# EAGLE board PCB final (EAGLE 9.7.0)
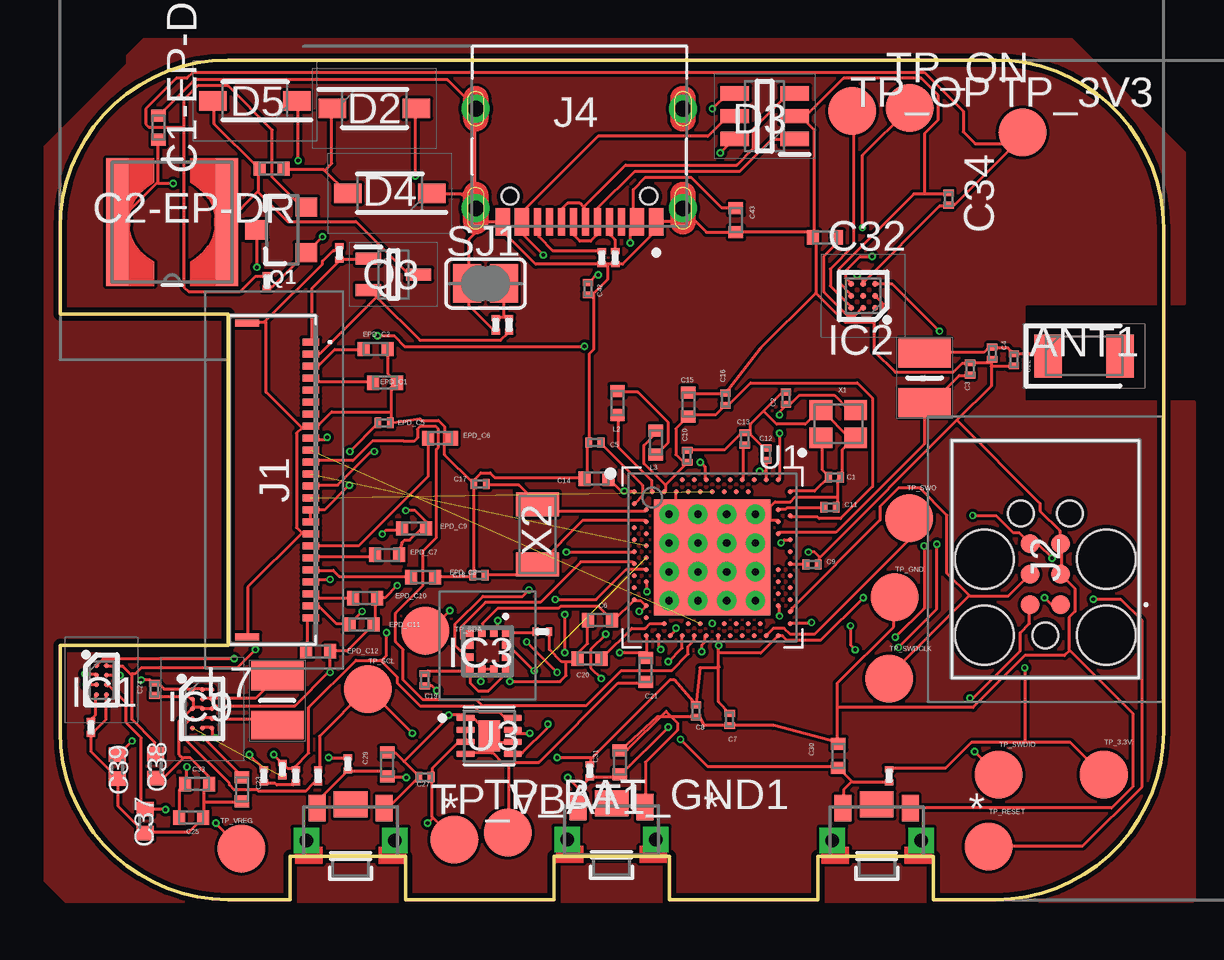
[diagram p0: board, top side]
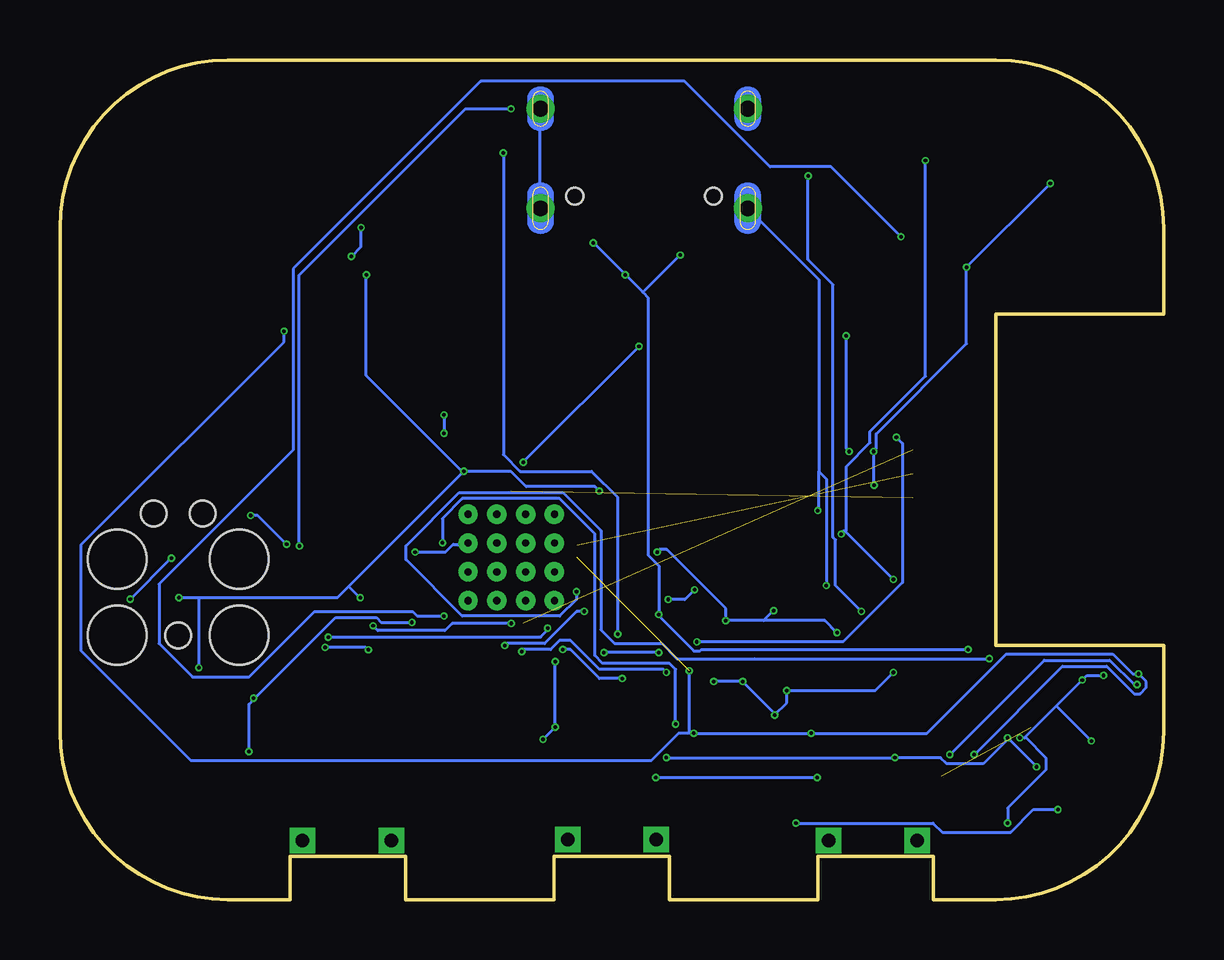
[diagram p1: board, bottom side, seen from below]

Size 46 x 35 mm. Coordinates in mm from the lower left corner, seen from the top.
Outline: 39,0 36.4,0 36.4,1.8 31.6,1.8 31.6,0 25.4,0 25.4,1.8 20.6,1.8 20.6,0 14.4,0 14.4,1.8 9.6,1.8 9.6,0 7,0 arc-90 0,7 0,10.6 7,10.6 7,24.4 0,24.4 0,28 arc-90 7,35 39,35 arc-90 46,28 46,7 arc-90 39,0
Copper layers (1*16): Top 0.035mm / dielectric 1.6mm / Bottom 0.035mm
Design rules "jlcpcb-2layers.dru": minimum track width 5mil, minimum drill 0.15mm, track to track 5mil, track to pad 5mil, pad to pad 5mil, via to via 5mil, smd to smd 5mil, copper to edge 0.2mm, drill to drill 6mil, minimum pad ring 10mil, minimum via ring 3mil, stop-mask expansion 4mil, vias tented up to drill 0mil, thermal gap 10mil

## Footprints (pad centres in the part's own frame; a part is rotated, then mirrored left to right if it is on the bottom)
2450AT18B100E_ANTC3216X140N = smd 1.15 x 1.8: 1 -1.5,0; 2 1.5,0
NORDIC_NRF_3_RESC0201_L = smd 0.28 x 0.43: 1 -0.255,0; 2 0.255,0
NORDIC_NRF_3_RESC0402_L = smd 0.5 x 0.6: 1 -0.5,0; 2 0.5,0
PERFECT_0402_0402 = smd 0.6 x 0.7: 1 -0.5,0; 2 0.5,0
ESP32_C6_LIBRARY_5_SOD3716X135N = smd 1.15 x 0.8: 1 -1.75,0; 2 1.75,0
ESP32_C6_LIBRARY_3_SOT95P280X145-6N = smd 1.2 x 0.6: 1 -1.25,0.95; 2 -1.25,0; 3 -1.25,-0.95; 4 1.25,-0.95; 5 1.25,0; 6 1.25,0.95
BQ25180YBGR_BGA8C40P2X4_100X155X50 = smd 0.2 x 0.2: A1 -0.2,0.6; A2 0.2,0.6; B1 -0.2,0.2; B2 0.2,0.2; C1 -0.2,-0.2; C2 0.2,-0.2; D1 -0.2,-0.6; D2 0.2,-0.6
DRV2605YZFR_BGA9C50P3X3_144X144X62 = smd 0.25 x 0.25: A1 -0.5,0.5; A2 0,0.5; A3 0.5,0.5; B1 -0.5,0; B2 0,0; B3 0.5,0; C1 -0.5,-0.5; C2 0,-0.5; C3 0.5,-0.5
BMA423_BMA423 = smd 0.3 x 0.35: 1 -0.75,-0.775; 2 -0.25,-0.775; 3 0.25,-0.775; 4 0.75,-0.775; 7 0.75,0.775; 8 0.25,0.775; 9 -0.25,0.775; 10 -0.75,0.775 | smd 0.35 x 0.3: 5 0.775,-0.25; 6 0.775,0.25; 11 -0.775,0.25; 12 -0.775,-0.25
RT6160AWSC_BGA15C40P3X5_140X230X60 = smd 0.216 x 0.216: A1 -0.4,0.8; A2 0,0.8; A3 0.4,0.8; B1 -0.4,0.4; B2 0,0.4; B3 0.4,0.4; C1 -0.4,0; C2 0,0; C3 0.4,0; D1 -0.4,-0.4; D2 0,-0.4; D3 0.4,-0.4; E1 -0.4,-0.8; E2 0,-0.8; E3 0.4,-0.8
503480-2400_5034802400 = smd 0.3 x 0.7: 1 -5.75,1.525; 2 -5.25,1.525; 3 -4.75,1.525; 4 -4.25,1.525; 5 -3.75,1.525; 6 -3.25,1.525; 7 -2.75,1.525; 8 -2.25,1.525; 9 -1.75,1.525; 10 -1.25,1.525; 11 -0.75,1.525; 12 -0.25,1.525; 13 0.25,1.525; 14 0.75,1.525; 15 1.25,1.525; 16 1.75,1.525; 17 2.25,1.525; 18 2.75,1.525; 19 3.25,1.525; 20 3.75,1.525; 21 4.25,1.525; 22 4.75,1.525; 23 5.25,1.525; 24 5.75,1.525 | smd 0.3 x 1: MP1 -6.54,-1.125; MP2 6.54,-1.125
TC2030-IDC_TC2030IDC = smd 0.783 x 0.783: 1 -0.953,-0.635; 2 -0.953,0.635; 3 0.317,-0.635; 4 0.317,0.635; 5 1.588,-0.635; 6 1.588,0.635 | hole 2.451: -2.223,-2.54; -2.223,2.54; 0.952,-2.54; 0.952,2.54 | hole 1.067: -2.223,0; 2.857,-1.016; 2.857,1.016
KH-TYPE-C-16P_KINGHELM_KH-TYPE-C-16P = smd 0.6 x 1.15: A1_B12 -3.2,4.725; A4_B9 -2.4,4.725; A9_B4 2.4,4.725; A12_B1 3.2,4.725 | smd 0.3 x 1.15: A5 -1.25,4.725; A6 -0.25,4.725; A7 0.25,4.725; A8 1.25,4.725; B5 1.75,4.725; B6 0.75,4.725; B7 -0.75,4.725; B8 -1.75,4.725 | drill 0.65 pad 1.05: SH1 -4.32,0; SH2 4.32,0; SH3 -4.32,4.15; SH4 4.32,4.15 | hole 0.7: -2.89,3.65; 2.89,3.65
MLP2016SR47MT0S1_INDC2016X100N = smd 1.2 x 2.2: 1 -1.028,0; 2 1.028,0
NORDIC_NRF_2_RESC0402_L = smd 0.5 x 0.6: 1 -0.5,0; 2 0.5,0
ESP32_C6_LIBRARY_2_IND_4828-WE-TPC_WRE = smd 0.9 x 5.3: 1 -2.286,0; 2 2.286,0
ESP32_C6_LIBRARY_4_ESP32_C6_LIBRARY_4_ESP32_C6_LIBRARY_4_ESP32_C6_LIBRARY_4_ESP32_WROVER_SPARKFUN-DISCRETESEMI_SOT23-3 = smd 0.8 x 0.9: 1 -0.95,-1; 2 0.95,-1; 3 0,1.1
ESP32_C6_LIBRARY_6_SOT65P210X110-3N = smd 1.05 x 0.5: 1 -1.05,0.65; 2 -1.05,-0.65; 3 1.05,0
CPF0201D7K68C1_0201 = smd 0.35 x 0.25: 1 0,0.275; 2 0,-0.275
ESP32_C6_LIBRARY_7_JUMPER_SJ = smd 1.168 x 1.6: 1 -0.762,0; 2 0.762,0
2025-10-22_07-23-44_LIBRARY_SW_EVP-AKE31A_PAN = smd 0.711 x 1.092: 1 -1.4,-0.972; 2 1.4,-0.972 | drill 0.559 pad 0.914 square: 3 -1.848,0.381; 4 1.848,0.381 | smd 1.397 x 1.092: 5 0,-1.124
HECTOR_WATCH_1_TP20R = smd 2 x 2: TP 0,0
NORDIC_NRF_4_AQFN50P700X700X85_HS-74N = smd 4.85 x 4.85: P$74 0,0 | drill 0.3 pad 0.6: P$75 -1.8,1.8; P$76 -0.6,1.8; P$77 0.6,1.8; P$78 1.8,1.8; P$79 -1.8,0.6; P$80 -0.6,0.6; P$81 0.6,0.6; P$82 1.8,0.6; P$83 -1.8,-0.6; P$84 -0.6,-0.6; P$85 0.6,-0.6; P$86 1.8,-0.6; P$87 -1.8,-1.8; P$88 -0.6,-1.8; P$89 0.6,-1.8; P$90 1.8,-1.8 | smd 0.2 x 0.2: P$A8 -1.25,3.25; P$A10 -0.75,3.25; P$A12 -0.25,3.25; P$A14 0.25,3.25; P$A16 0.75,3.25; P$A18 1.25,3.25; P$A20 1.75,3.25; P$A22 2.25,3.25; P$A23 2.75,3.25; P$AA24 3.25,-2.25; P$AB2 -2.75,-2.5; P$AC5 -2,-2.75; P$AC9 -1,-2.75; P$AC11 -0.5,-2.75; P$AC13 0,-2.75; P$AC15 0.5,-2.75; P$AC17 1,-2.75; P$AC19 1.5,-2.75; P$AC21 2,-2.75; P$AC24 3.25,-2.75; P$AD2 -2.75,-3.25; P$AD4 -2.25,-3.25; P$AD6 -1.75,-3.25; P$AD8 -1.25,-3.25; P$AD10 -0.75,-3.25; P$AD12 -0.25,-3.25; P$AD14 0.25,-3.25; P$AD16 0.75,-3.25; P$AD18 1.25,-3.25; P$AD20 1.75,-3.25; P$AD22 2.25,-3.25; P$AD23 2.75,-3.25; P$B1 -3.25,2.75; P$B3 -2.5,2.75; P$B5 -2,2.75; P$B7 -1.5,2.75; P$B9 -1,2.75; P$B11 -0.5,2.75; P$B13 0,2.75; P$B15 0.5,2.75; P$B17 1,2.75; P$B19 1.5,2.75; P$B24 3.25,2.75; P$C1 -3.25,2.25; P$D2 -2.75,2; P$D23 2.75,2; P$E24 3.25,1.75; P$F2 -2.75,1.5; P$F23 2.75,1.5; P$G1 -3.25,1.25; P$H2 -2.75,1; P$H23 2.75,1; P$J1 -3.25,0.75; P$J24 3.25,0.75; P$K2 -2.75,0.5; P$L1 -3.25,0.25; P$L24 3.25,0.25; P$M2 -2.75,0; P$N1 -3.25,-0.25; P$N24 3.25,-0.25; P$P2 -2.75,-0.5; P$P23 2.75,-0.5; P$R1 -3.25,-0.75; P$R24 3.25,-0.75; P$T2 -2.75,-1; P$T23 2.75,-1; P$U1 -3.25,-1.25; P$U24 3.25,-1.25; P$V23 2.75,-1.5; P$W1 -3.25,-1.75; P$W24 3.25,-1.75; P$Y2 -2.75,-2; P$Y23 2.75,-2
ESP32_C6_LIBRARY_SON50P200X200X80-9N = smd 0.76 x 0.27: 1 -0.985,0.75; 2 -0.985,0.25; 3 -0.985,-0.25; 4 -0.985,-0.75; 5 0.985,-0.75; 6 0.985,-0.25; 7 0.985,0.25; 8 0.985,0.75 | smd 0.9 x 1.3: 9 0,0
NORDIC_NRF_BT-XTAL_2016_N = smd 0.95 x 0.85: 1 -0.725,-0.575; 2 0.725,-0.575; 3 0.725,0.575; 4 -0.725,0.575
NORDIC_NRF_1_XTAL_3215_N = smd 1 x 1.8: 1 -1.25,0; 2 1.25,0

## Placement (x,y rotation side)
ANT1  2450AT18B100E  [2450AT18B100E_ANTC3216X140N]  42.69,22.66 0 top
C1  12pF  [NORDIC_NRF_3_RESC0201_L]  32.29,17.6 0 top
C1-EP-DR  10uF  [NORDIC_NRF_3_RESC0402_L]  4.11,32.17 90 top
C2  12pF  [NORDIC_NRF_3_RESC0201_L]  30.26,20.9 90 top
C2-EP-DR  4.7uF/25V  [NORDIC_NRF_3_RESC0402_L]  8.82,30.47 180 top
C3  1pF  [NORDIC_NRF_3_RESC0201_L]  37.94,22.12 90 top
C4  1pF  [NORDIC_NRF_3_RESC0201_L]  38.86,22.78 270 top
C5  100nF  [NORDIC_NRF_3_RESC0201_L]  22.3,19.05 180 top
C6  4.7uF  [NORDIC_NRF_3_RESC0402_L]  22.52,11.65 180 top
C7  100nF  [NORDIC_NRF_3_RESC0201_L]  27.91,7.51 270 top
C8  100nF  [NORDIC_NRF_3_RESC0201_L]  26.51,7.86 270 top
C9  820pF  [NORDIC_NRF_3_RESC0201_L]  31.35,13.97 0 top
C10  N.C  [NORDIC_NRF_3_RESC0201_L]  26.14,18.48 90 top
C11  100pF  [NORDIC_NRF_3_RESC0201_L]  32.1,16.35 0 top
C12  100nF  [NORDIC_NRF_3_RESC0201_L]  29.45,18.57 90 top
C13  N.C  [NORDIC_NRF_3_RESC0201_L]  28.54,19.2 90 top
C14  4.7uF  [NORDIC_NRF_3_RESC0402_L]  22.37,17.55 180 top
C15  1.0uF  [NORDIC_NRF_3_RESC0402_L]  26.19,20.64 90 top
C16  47Nf  [NORDIC_NRF_3_RESC0201_L]  27.74,20.86 90 top
C17  12pF  [NORDIC_NRF_3_RESC0201_L]  17.51,17.32 0 top
C18  12pF  [NORDIC_NRF_3_RESC0201_L]  17.46,13.52 0 top
C19  100nF  [NORDIC_NRF_3_RESC0201_L]  15.21,9.16 270 top
C20  4.7uF  [NORDIC_NRF_3_RESC0402_L]  22.07,10.05 180 top
C21  4.7uF  [NORDIC_NRF_3_RESC0402_L]  24.41,9.58 270 top
C22  N.C  [NORDIC_NRF_3_RESC0201_L]  39.76,22.5 270 top
C23  0.1uF  [NORDIC_NRF_3_RESC0402_L]  7.59,4.59 90 top
C24  10uF  [NORDIC_NRF_3_RESC0201_L]  3.94,8.77 90 top
C25  22uF  [NORDIC_NRF_3_RESC0402_L]  5.46,3.42 0 top
C27  0.1uF  [NORDIC_NRF_3_RESC0201_L]  15.21,5.1 180 top
C29  1uF  [NORDIC_NRF_3_RESC0402_L]  13.64,5.63 90 top
C30  1uF  [NORDIC_NRF_3_RESC0402_L]  32.44,5.99 90 top
C31  1uF  [NORDIC_NRF_3_RESC0402_L]  23.34,5.71 90 top
C32  1uF  [NORDIC_NRF_3_RESC0402_L]  31.89,27.6 180 top
C33  22uF  [NORDIC_NRF_3_RESC0402_L]  5.71,4.82 0 top
C34  0.1uF  [NORDIC_NRF_3_RESC0201_L]  37.04,29.2 90 top
C37  1uF  [PERFECT_0402_0402]  3.55,3.27 270 top
C38  1uF  [PERFECT_0402_0402]  3.99,5.56 270 top
C39  10uF  [PERFECT_0402_0402]  2.39,5.54 270 top
C42  0.1uF  [NORDIC_NRF_3_RESC0201_L]  22.01,25.46 270 top
C43  4.7uF  [NORDIC_NRF_3_RESC0402_L]  28.17,28.31 270 top
D2  MBR0530  [ESP32_C6_LIBRARY_5_SOD3716X135N]  13.11,32.98 0 top
D3  USBLC6-2SC6Y  [ESP32_C6_LIBRARY_3_SOT95P280X145-6N]  29.37,32.66 180 top
D4  MBR0530  [ESP32_C6_LIBRARY_5_SOD3716X135N]  13.75,29.44 180 top
D5  MBR0530  [ESP32_C6_LIBRARY_5_SOD3716X135N]  8.13,33.29 180 top
EPD_C1  1uF/50V  [NORDIC_NRF_3_RESC0402_L]  13.55,21.55 180 top
EPD_C2  1uF/50V  [NORDIC_NRF_3_RESC0402_L]  13.16,22.95 180 top
EPD_C5  0.1uF/50V  [NORDIC_NRF_3_RESC0201_L]  13.51,19.87 180 top
EPD_C6  1uF/50V  [NORDIC_NRF_3_RESC0402_L]  15.84,19.23 180 top
EPD_C7  1uF/50V  [NORDIC_NRF_3_RESC0402_L]  13.63,14.37 180 top
EPD_C8  1uF/50V  [NORDIC_NRF_3_RESC0402_L]  15.13,13.44 180 top
EPD_C9  1uF/50V  [NORDIC_NRF_3_RESC0402_L]  14.75,15.47 180 top
EPD_C10  1uF/50V  [NORDIC_NRF_3_RESC0402_L]  12.71,12.57 180 top
EPD_C11  1uF/50V  [NORDIC_NRF_3_RESC0402_L]  12.57,11.47 180 top
EPD_C12  1uF/50V  [NORDIC_NRF_3_RESC0402_L]  10.77,10.35 180 top
IC1  BQ25180YBGR_BQ25180YBGR  [BQ25180YBGR_BGA8C40P2X4_100X155X50]  1.73,9.15 0 top
IC2  DRV2605YZFR  [DRV2605YZFR_BGA9C50P3X3_144X144X62]  33.48,25.17 180 top
IC3  BMA421  [BMA423_BMA423]  17.83,10.35 180 top
IC9  RT6160AWSC  [RT6160AWSC_BGA15C40P3X5_140X230X60]  5.93,7.95 0 top
J1  503480-2400  [503480-2400_5034802400]  8.93,17.49 270 top
J2  TC2030-IDC  [TC2030-IDC_TC2030IDC]  41.07,13.24 90 top
J4  KH-TYPE-C-16P  [KH-TYPE-C-16P_KINGHELM_KH-TYPE-C-16P]  21.65,32.97 180 top
L1  3.9nH  [MLP2016SR47MT0S1_INDC2016X100N]  36.04,21.75 90 top
L2  10uH  [NORDIC_NRF_2_RESC0402_L]  23.24,20.7 90 top
L3  15nH  [NORDIC_NRF_2_RESC0402_L]  24.84,19.05 90 top
L5  68uH  [ESP32_C6_LIBRARY_2_IND_4828-WE-TPC_WRE]  4.67,28.24 180 top
L7  FTC252012SR47MBCA  [MLP2016SR47MT0S1_INDC2016X100N]  9.06,8.3 270 top
Q1  20V/4.2A/52mΩ/1.4W  [ESP32_C6_LIBRARY_4_ESP32_C6_LIBRARY_4_ESP32_C6_LIBRARY_4_ESP32_C6_LIBRARY_4_ESP32_WROVER_SPARKFUN-DISCRETESEMI_SOT23-3]  9.27,27.92 90 top
Q3  SI1308EDL-T1-GE3  [ESP32_C6_LIBRARY_6_SOT65P210X110-3N]  13.9,26.06 0 top
R1_EP_DR  0.47  [CPF0201D7K68C1_0201]  18.72,23.96 0 top
R1_USB  5K1  [CPF0201D7K68C1_0201]  23.14,26.76 180 top
R2  0  [CPF0201D7K68C1_0201]  9.27,5.42 0 top
R2-USB1  5K1  [CPF0201D7K68C1_0201]  22.58,26.76 0 top
R2_EP_DR  10K  [CPF0201D7K68C1_0201]  11.64,26.96 0 top
R3  0  [CPF0201D7K68C1_0201]  20.1,11.16 270 top
R4  0  [CPF0201D7K68C1_0201]  10.76,5.16 0 top
R5  10K  [CPF0201D7K68C1_0201]  12,5.66 180 top
R7  10K  [CPF0201D7K68C1_0201]  34.56,5.16 180 top
R8  10K  [CPF0201D7K68C1_0201]  22.08,5.36 180 top
R9  10K  [CPF0201D7K68C1_0201]  1.29,7.18 180 top
R17  3K3  [CPF0201D7K68C1_0201]  8.5,5.16 180 top
R18  3K3  [CPF0201D7K68C1_0201]  9.84,5.16 180 top
R_PWR_EPD  10k  [CPF0201D7K68C1_0201]  8.62,25.76 180 top
R_TYPE_SEL  2.2  [CPF0201D7K68C1_0201]  18.16,23.96 180 top
SJ1  [ESP32_C6_LIBRARY_7_JUMPER_SJ]  17.74,25.68 0 top
SW_DN  2025-10-22_07-23-44_LIBRARY_EVP-AKE31ASW_EVP-AKE31A_PAN  [2025-10-22_07-23-44_LIBRARY_SW_EVP-AKE31A_PAN]  12.11,2.84 180 top
SW_ENT  2025-10-22_07-23-44_LIBRARY_EVP-AKE31ASW_EVP-AKE31A_PAN  [2025-10-22_07-23-44_LIBRARY_SW_EVP-AKE31A_PAN]  22.99,2.89 180 top
SW_UP  2025-10-22_07-23-44_LIBRARY_EVP-AKE31ASW_EVP-AKE31A_PAN  [2025-10-22_07-23-44_LIBRARY_SW_EVP-AKE31A_PAN]  34.04,2.84 180 top
TP_3.3V  HECTOR_WATCH_1_TPTP20R  [HECTOR_WATCH_1_TP20R]  43.51,5.2 0 top
TP_3V3  HECTOR_WATCH_1_TPTP20R  [HECTOR_WATCH_1_TP20R]  40.12,31.98 0 top
TP_BAT_GND1  HECTOR_WATCH_1_TPTP20R  [HECTOR_WATCH_1_TP20R]  18.66,2.8 0 top
TP_GND  HECTOR_WATCH_1_TPTP20R  [HECTOR_WATCH_1_TP20R]  34.8,12.6 0 top
TP_ON  HECTOR_WATCH_1_TPTP20R  [HECTOR_WATCH_1_TP20R]  35.42,33 0 top
TP_OP  HECTOR_WATCH_1_TPTP20R  [HECTOR_WATCH_1_TP20R]  33.03,32.88 0 top
TP_RESET  HECTOR_WATCH_1_TPTP20R  [HECTOR_WATCH_1_TP20R]  38.7,2.2 0 top
TP_SCL  HECTOR_WATCH_1_TPTP20R  [HECTOR_WATCH_1_TP20R]  12.84,8.78 0 top
TP_SDA  HECTOR_WATCH_1_TPTP20R  [HECTOR_WATCH_1_TP20R]  15.23,11.2 0 top
TP_SWDCLK  HECTOR_WATCH_1_TPTP20R  [HECTOR_WATCH_1_TP20R]  34.56,9.2 0 top
TP_SWDIO  HECTOR_WATCH_1_TPTP20R  [HECTOR_WATCH_1_TP20R]  39.13,5.2 0 top
TP_SWO  HECTOR_WATCH_1_TPTP20R  [HECTOR_WATCH_1_TP20R]  35.39,15.9 0 top
TP_VBAT1  HECTOR_WATCH_1_TPTP20R  [HECTOR_WATCH_1_TP20R]  16.44,2.5 0 top
TP_VREG  HECTOR_WATCH_1_TPTP20R  [HECTOR_WATCH_1_TP20R]  7.56,2.12 0 top
U1  NRF52840_QF  [NORDIC_NRF_4_AQFN50P700X700X85_HS-74N]  27.19,14.26 0 top
U3  MAX17048G+T10  [ESP32_C6_LIBRARY_SON50P200X200X80-9N]  17.89,6.82 0 top
X1  32MHZ  [NORDIC_NRF_BT-XTAL_2016_N]  32.44,19.83 0 top
X2  32.768kHZ  [NORDIC_NRF_1_XTAL_3215_N]  19.9,15.22 90 top

## Library data of the parts
ANT1 = InkTime_v5; ARROW_PART_NUMBER: 2450AT18B100E; ARROW_PRICE-STOCK: https://www.arrow.com/en/products/2450at18b100e/johanson-dielectrics?utm_currency=USD&region=nac; DESCRIPTION: Antennas 2.45GHz ANTENNA; HEIGHT: 1.4mm; MANUFACTURER_NAME: JOHANSON TECHNOLOGY; MANUFACTURER_PART_NUMBER: 2450AT18B100E; MOUSER_PART_NUMBER: 609-2450AT18B100E; MOUSER_PRICE-STOCK: https://www.mouser.co.uk/ProductDetail/Johanson-Technology/2450AT18B100E?qs=yCnrNFeXz%252Bh5MFsFIXGZGA%3D%3D
C1 C1-EP-DR C2 C2-EP-DR C3-C25 C27 C29-C34 C37-C39 C42 C43 EPD_C1 EPD_C2 EPD_C5-EPD_C12 L2 L3 R1_EP_DR R1_USB R2 R2-USB1 R2_EP_DR R3-R5 R7-R9 R17 R18 R_PWR_EPD R_TYPE_SEL SJ1 TP_3.3V TP_3V3 TP_BAT_GND1 TP_GND TP_ON TP_OP TP_RESET TP_SCL TP_SDA TP_SWDCLK TP_SWDIO TP_SWO TP_VBAT1 TP_VREG U1 X1 X2 = InkTime_v5
D2 D4 D5 = InkTime_v5; AVAILABILITY: In Stock; CHECK_PRICES: https://www.snapeda.com/parts/MBR0530/Onsemi/view-part/?ref=eda; DESCRIPTION: Diode Schottky 30 V 500mA Surface Mount SOD-123; MF: ON Semiconductor; MP: MBR0530; PACKAGE: SOD-123-2 ON Semiconductor; PRICE: None; PURCHASE-URL: https://www.snapeda.com/api/url_track_click_mouser/?unipart_id=179458&manufacturer=ON Semiconductor&part_name=MBR0530&search_term=None; SNAPEDA_LINK: https://www.snapeda.com/parts/MBR0530/Onsemi/view-part/?ref=snap
D3 = InkTime_v5; AVAILABILITY: In Stock; CHECK_PRICES: https://www.snapeda.com/parts/USBLC6-2SC6Y/STMicroelectronics/view-part/?ref=eda; DESCRIPTION: 17V Clamp 5A (8/20µs) Ipp Tvs Diode Surface Mount SOT-23-6; MF: STMicroelectronics; MP: USBLC6-2SC6Y; PACKAGE: SOT-23-6 STMicroelectronics; PRICE: None; SNAPEDA_LINK: https://www.snapeda.com/parts/USBLC6-2SC6Y/STMicroelectronics/view-part/?ref=snap
IC1 = InkTime_v5; ARROW_PART_NUMBER: BQ25180YBGR; ARROW_PRICE-STOCK: https://www.arrow.com/en/products/bq25180ybgr/texas-instruments?utm_currency=USD&region=nac; DESCRIPTION: Charger IC Lithium Ion/Polymer, Lithium Iron Phosphate 8-DSBGA (1.6x1.1); HEIGHT: 0.5mm; MANUFACTURER_NAME: Texas Instruments; MANUFACTURER_PART_NUMBER: BQ25180YBGR; MOUSER_PART_NUMBER: 595-BQ25180YBGR; MOUSER_PRICE-STOCK: https://www.mouser.co.uk/ProductDetail/Texas-Instruments/BQ25180YBGR?qs=doiCPypUmgEWjAK%252BJAX6Tw%3D%3D
IC2 = InkTime_v5; ARROW_PART_NUMBER: DRV2605YZFR; ARROW_PRICE-STOCK: https://www.arrow.com/en/products/drv2605yzfr/texas-instruments?region=nac; DESCRIPTION: Haptic Driver for ERM/LRA with Built-In Library and Smart Loop Architecture; HEIGHT: 0.625mm; MANUFACTURER_NAME: Texas Instruments; MANUFACTURER_PART_NUMBER: DRV2605YZFR
IC3 = InkTime_v5; ARROW_PART_NUMBER: BMA423; ARROW_PRICE-STOCK: https://www.arrow.com/en/products/bma423/bosch; DESCRIPTION: Accelerometers Triaxial low-g 12bit Acceleration Sensor; HEIGHT: 1mm; MANUFACTURER_NAME: BOSCH; MANUFACTURER_PART_NUMBER: BMA423; MOUSER_PART_NUMBER: 262-BMA423; MOUSER_PRICE-STOCK: https://www.mouser.co.uk/ProductDetail/Bosch-Sensortec/BMA423?qs=HXFqYaX1Q2xC%252BSgeGoX3mg%3D%3D
IC9 = InkTime_v5; DESCRIPTION: Buck-Boost Regulator Positive Output Step-Up/Step-Down I2C DC-DC Controller IC 15-WL-CSP (BSC) (1.4x2.3); HEIGHT: 0.6mm; MANUFACTURER_NAME: RICHTEK; MANUFACTURER_PART_NUMBER: RT6160AWSC; MOUSER_PART_NUMBER: 835-RT6160AWSC; MOUSER_PRICE-STOCK: https://www.mouser.co.uk/ProductDetail/Richtek/RT6160AWSC?qs=amGC7iS6iy%2FLd9PSoixZXQ%3D%3D
J1 = InkTime_v5; DESCRIPTION: FFC & FPC Connectors 0.5mm FPC RA SMT Dual Contact 24Ckt; HEIGHT: 1.87mm; MANUFACTURER_NAME: Molex; MANUFACTURER_PART_NUMBER: 503480-2400; MOUSER_PART_NUMBER: 538-503480-2400; MOUSER_PRICE-STOCK: https://www.mouser.co.uk/ProductDetail/Molex/503480-2400?qs=OAhjpuo3Vu7efIoxFh9AOw%3D%3D
J2 = InkTime_v5; DESCRIPTION: CABLE ADAPTER 6 POS; HEIGHT: 19mm; MANUFACTURER_NAME: Tag Connect; MANUFACTURER_PART_NUMBER: TC2030-IDC
J4 = InkTime_v5; AVAILABILITY: Not in stock; CHECK_PRICES: https://www.snapeda.com/parts/KH-TYPE-C-16P/Kinghelm/view-part/?ref=eda; MF: kinghelm; MP: KH-TYPE-C-16P; PACKAGE: None; PRICE: None; SNAPEDA_LINK: https://www.snapeda.com/parts/KH-TYPE-C-16P/Kinghelm/view-part/?ref=snap
L1 L7 = InkTime_v5; DESCRIPTION: SMD / SMT Inductors (Coils), L=0.47?H, L x W x T :; HEIGHT: 1mm; JLCPCB: https://jlcpcb.com/partdetail/6763488-FTC252012SR47MBCA/C5832368; MANUFACTURER_NAME: TDK; MANUFACTURER_PART_NUMBER: FTC252012SR47MBCA
L5 = InkTime_v5; COPYRIGHT: Copyright (C) 2024 Ultra Librarian. All rights reserved.; MANUFACTURER_PART_NUMBER: 744043680; MFR_NAME: Wurth Electronics
Q1 = InkTime_v5; PROD_ID: TRAN-14388
Q3 = InkTime_v5; AVAILABILITY: In Stock; CHECK_PRICES: https://www.snapeda.com/parts/SI1308EDL-T1-GE3/Vishay+Siliconix/view-part/?ref=eda; DESCRIPTION: Si1308EDL-T1-GE3 N-channel MOSFET Transistor, 1.5 A, 30 V, 3-Pin SC-70 | Siliconix / Vishay SI1308EDL-T1-GE3; MF: Vishay Siliconix; MP: SI1308EDL-T1-GE3; PACKAGE: SOT-323 Vishay Semiconductor; PRICE: None; PURCHASE-URL: https://www.snapeda.com/api/url_track_click_mouser/?unipart_id=274603&manufacturer=Vishay Siliconix&part_name=SI1308EDL-T1-GE3&search_term=None; SNAPEDA_LINK: https://www.snapeda.com/parts/SI1308EDL-T1-GE3/Vishay+Siliconix/view-part/?ref=snap
SW_DN SW_ENT SW_UP = InkTime_v5; COPYRIGHT: Copyright (C) 2025 Ultra Librarian. All rights reserved.; DIGI-KEY_PART_NUMBER_1: P123437TR-ND; DIGI-KEY_PART_NUMBER_2: P123437CT-ND; DIGI-KEY_PART_NUMBER_3: P123437DKR-ND; MANUFACTURER_NAME: Panasonic; MANUFACTURER_PART_NUMBER: EVP-AKE31A
U3 = InkTime_v5; AVAILABILITY: In Stock; CHECK_PRICES: https://www.snapeda.com/parts/MAX17048G+T10/Analog+Devices/view-part/?ref=eda; DESCRIPTION: 3µA 1-Cell/2-Cell Fuel Gauge with ModelGauge; MF: Analog Devices; MP: MAX17048G+T10; PACKAGE: TDFN-8 Maxim; PRICE: None; PURCHASE-URL: https://www.snapeda.com/api/url_track_click_mouser/?unipart_id=329239&manufacturer=Analog Devices&part_name=MAX17048G+T10&search_term=None; SNAPEDA_LINK: https://www.snapeda.com/parts/MAX17048G+T10/Analog+Devices/view-part/?ref=snap

## Nets
3V3 [3v3]: C6.1 C7.1 C8.1 C12.1 C14.1 C25.1 C33.1 C34.1 IC2.C2 IC3.3 IC9.E2 IC9.E3 J2.1 Q1.2 R5.2 R7.2 R8.2 R_PWR_EPD.2 TP_3.3V.TP TP_3V3.TP U1.P$A22 U1.P$AD14 U1.P$AD23 U1.P$B1 U1.P$W1 U1.P$Y2
3V3/2.4A [3v3]: C19.1 IC3.7 IC3.10
ALERT: U1.P$J24 U3.5
D+: D3.4 U1.P$AD6
D-: D3.6 U1.P$AD4
DN: D3.1 J4.A7 J4.B7
DP: D3.3 J4.A6 J4.B6
EPD_3V3 [3v3]: C1-EP-DR.1 EPD_C5.2 J1.15 J1.16 L5.2 Q1.3
EPD_BUSY: J1.9 U1.P$AD12
EPD_CS: J1.12 U1.P$K2
EPD_DC: J1.11 U1.P$AD10
EPD_RST: J1.10 U1.P$AC11
GDR: J1.1 Q3.1 R2_EP_DR.2
GND: C1-EP-DR.2 C1.2 C2.2 C3.2 C4.2 C5.2 C6.2 C7.2 C8.2 C9.2 C10.2 C11.2 C12.2 C13.2 C14.2 C15.2 C16.2 C17.1 C18.1 C19.2 C20.2 C21.2 C22.2 C23.1 C24.1 C25.2 C27.2 C29.2 C30.2 C31.2 C32.2 C33.2 C34.2 C37.2 C38.2 C39.2 C42.2 C43.2 D3.2 D4.1 EPD_C1.1 EPD_C2.1 EPD_C5.1 EPD_C6.1 EPD_C7.1 EPD_C8.1 EPD_C9.1 EPD_C10.1 EPD_C11.1 EPD_C12.1 IC1.D2 IC2.B1 IC2.B3 IC3.8 IC3.9 IC9.B1 IC9.C1 IC9.C2 IC9.C3 J1.8 J1.17 J1.MP1 J1.MP2 J2.3 J2.5 J4.A1_B12 J4.A12_B1 J4.SH1 J4.SH2 J4.SH3 J4.SH4 R1_USB.1 R2-USB1.2 R2_EP_DR.1 R3.1 R9.1 R_TYPE_SEL.1 SJ1.1 SW_DN.1 SW_ENT.1 SW_UP.1 TP_BAT_GND1.TP TP_GND.TP U1.P$74 U1.P$75 U1.P$76 U1.P$77 U1.P$78 U1.P$79 U1.P$80 U1.P$81 U1.P$82 U1.P$83 U1.P$84 U1.P$85 U1.P$86 U1.P$87 U1.P$88 U1.P$89 U1.P$90 U1.P$B7 U1.P$F23 U3.1 U3.4 U3.6 U3.9 X1.2 X1.4
HAPTIC_EN: U1.P$U1
HAPTIC_EN/1.4C: IC2.A1
IMU_INT1: IC3.5 U1.P$N1
IMU_INT2: IC3.6 U1.P$P2
LX1: IC9.B2 IC9.B3 L7.1
LX2: IC9.D2 IC9.D3 L7.2
MOSI: J1.14 U1.P$B13
N$1: IC9.D1 R4.2
N$4: C5.1 U1.P$C1
N$5: C9.1 U1.P$N24
N$6: C20.1 U1.P$AC5
N$7: C11.1 U1.P$D23
N$8: IC9.E1 R2.2
N$9: IC1.D1 R9.2
N$10: J4.A5 R1_USB.2
N$11: IC3.1 R3.2
N$13: L2.1 U1.P$B3
N$14: C10.1 C15.1 C16.1 L3.2 U1.P$B5 U1.P$E24
N$15: C3.1 L1.1 U1.P$H23
N$16: ANT1.1 C4.1 C22.1 L1.2
N$17: C1.1 U1.P$B24 X1.1
N$18: C2.1 U1.P$A23 X1.3
N$19: C17.2 U1.P$D2 X2.2
N$20: C18.2 U1.P$F2 X2.1
N$21: L2.2 L3.1
N$22: R17.1 R18.1
N$23: C13.1 U1.P$A18
N$24: J4.B5 R2-USB1.1
N$28: C32.1 IC2.A2
N$32: EPD_C2.2 J1.3
N$33: EPD_C1.2 J1.4
N$34: EPD_C6.2 J1.18
N$35: EPD_C7.2 J1.19
N$37: EPD_C8.2 J1.20
N$39: EPD_C10.2 J1.22
N$42: EPD_C12.2 J1.24
N$43: C2-EP-DR.2 D5.2 L5.1 Q3.3
N$44: C2-EP-DR.1 D2.1 D4.2
N$45: R1_EP_DR.1 R_TYPE_SEL.2 SJ1.2
OUT+: IC2.A3 TP_OP.TP
OUT-: IC2.C3 TP_ON.TP
P0.04: U1.P$J1
P0.09: U1.P$L24
P0.13: C29.1 C30.1 C31.1 R5.1 R7.1 R8.1 SW_DN.2 SW_ENT.2 SW_UP.2 U1.P$AD8
P0.14: U1.P$AC9
P0.19: U1.P$AC15
P0.20: U1.P$AD16
P0.21: U1.P$AC17
P0.22: U1.P$AD18
P0.23: U1.P$AC19
P0.24: U1.P$AD20
P0.25: U1.P$AC21
P0.26: U1.P$G1
P0.27: U1.P$H2
P0.28: U1.P$B11
P0.29: U1.P$A10
P0.30: U1.P$B9
P0.31: U1.P$A8
P1.01: Q1.1 R_PWR_EPD.1 U1.P$Y23
P1.02: U1.P$W24
P1.03: U1.P$V23
P1.04: U1.P$U24
P1.05: U1.P$T23
P1.06: U1.P$R24
P1.07: U1.P$P23
P1.09: U1.P$R1
P1.10: U1.P$A20
P1.11: U1.P$B19
P1.12: U1.P$B17
P1.13: U1.P$A16
P1.14: U1.P$B15
P1.15: U1.P$A14
PMIC_INT: IC1.A1 U1.P$T2
PREVGH [3v3]: D5.1 EPD_C9.2 J1.21
PREVGL [3v3]: D2.2 EPD_C11.2 J1.23
RESE: J1.2 Q3.2 R1_EP_DR.2
RESET: J2.6 TP_RESET.TP U1.P$AC13
SCK: J1.13 U1.P$A12
SCL: IC1.B1 IC2.C1 IC3.12 R4.1 R17.2 TP_SCL.TP U1.P$M2 U3.7
SDA: IC1.C1 IC3.2 R2.1 R18.2 TP_SDA.TP U1.P$L1 U3.8
SDA/1.4C: IC2.B2
SWDCLK: J2.4 TP_SWDCLK.TP U1.P$AA24
SWDIO: J2.2 TP_SWDIO.TP U1.P$AC24
SWO: TP_SWO.TP U1.P$AD22
VBAT [3v3]: C27.1 C37.1 IC1.C2 TP_VBAT1.TP U3.2 U3.3
VBUS [3v3]: C21.1 C38.1 C42.1 C43.1 D3.5 IC1.A2 J4.A4_B9 J4.A9_B4 U1.P$AD2
VREG [3v3]: C23.2 C24.2 C39.1 IC1.B2 IC9.A1 IC9.A2 IC9.A3 TP_VREG.TP

## Tracks (layer width: path | path; a pad name or v marks a point on that pad's centre or on a via)
3V3  (via drill 0.15)
  Top 0.127: 5.16,32.2 5.16,33.35 5.74,33.92 7.01,33.92 8.85,32.08 8.85,30.11 10.05,28.9 10.25,28.9 Q1.2 | 5.16,32.2 5.16,25.53 5.36,25.34 7.51,25.34 8.15,25.98 8.59,25.98 R_PWR_EPD.2 | 39.84,31.51 37.3,28.96 37.07,28.96 C34.1 37.01,28.9 36.66,28.9 33.49,25.73 IC2.C2 33.49,25.79 v33.23,26.04 | TP_3V3.TP 40.09,31.95 40.09,31.76 39.84,31.51 | 5.16,32.2 3.7,32.2 3.58,32.33 3.58,32.97 4.85,34.23 5.29,34.23 5.55,34.49 36.03,34.49 37.65,32.87 37.65,32.01 38.15,31.51 39.84,31.51 | IC9.E2 5.99,7.18 6.31,7.18 IC9.E3 6.37,7.12 6.37,6.87 v6.5,6.74 | v5.29,5.53 5.29,4.9 5.23,4.84 C33.1 5.16,4.77 4.97,4.58 4.97,3.44 C25.1 | v11.2,5.91 11.96,5.91 R5.2 | IC3.3 17.61,11.18 17.61,11.5 18.25,12.14 20.79,12.14 20.87,12.23 22.45,12.23 C6.1 23.07,11.63 23.9,12.45 U1.P$W1 23.96,12.45 24.21,12.45 24.41,12.26 U1.P$Y2 24.41,12.2 24.21,12.01 v24.15,12.01 | 27.45,9.72 27.45,10.28 | 27.45,10.28 v27.45,10.59 27.45,11 U1.P$AD14 | 27.45,9.72 27.49,9.69 27.45,9.66 26.67,9.66 C8.1 25.61,9.15 25.42,9.15 22.15,5.88 | C7.1 27.45,8.25 27.45,9.72 | 27.45,10.28 29.21,10.28 29.93,10.99 U1.P$AD23 29.99,10.99 30.12,10.99 30.31,10.8 31.71,10.8 v33.49,12.58 | 22.15,5.88 22.12,5.85 22.12,5.66 R8.2 | v20.72,5.91 22.12,5.91 22.15,5.88 | 40.22,6.55 42.12,6.55 43.45,5.22 TP_3.3V.TP | 40.22,6.55 37.99,6.55 36.91,5.47 34.56,5.47 R7.2 | 29.42,17.85 29.42,18.3 C12.1 | 29.42,17.85 29.42,17.53 U1.P$A22 | U1.P$B1 23.9,17.03 v23.52,17.03 23.39,17.03 22.88,17.53 C14.1 | v29.17,17.85 29.42,17.85 | v41.04,12.58 41.3,12.33 41.68,12.33 J2.1 | v40.22,9.66 40.22,6.55
  Bottom 0.127: v5.29,5.53 v6.5,6.74 6.5,6.68 7.51,5.66 9.04,5.66 9.29,5.91 v11.2,5.91 v20.72,5.91 | v24.15,12.01 24.47,12.01 25.8,10.68 27.37,10.68 v27.45,10.59 | v29.17,17.85 27.2,17.85 26.56,17.22 23.71,17.22 v23.52,17.03 | 40.22,12.58 34.44,12.58 33.96,13.06 | 40.22,12.58 v41.04,12.58 | v29.17,17.85 33.96,13.06 | 40.22,12.58 v40.22,9.66 | 33.96,13.06 v33.49,12.58 | v33.23,26.04 33.23,21.85 29.23,17.85 v29.17,17.85
3V3/2.4A
  Top 0.127: C19.1 15.26,9.47 15.33,9.53 17.04,9.53 IC3.7 17.1,9.53 17.1,9.03 17.42,8.71 17.86,8.71 18.56,9.41 18.56,9.53 IC3.10
ALERT  (via drill 0.15)
  Top 0.127: v30.06,14.87 30.18,14.99 30.44,14.99 U1.P$J24 | v20.34,7.31 20.34,7.18 19.26,6.1 18.88,6.1 U3.5
  Bottom 0.127: v30.06,14.87 30.06,15.88 29.23,16.71 25.17,16.71 23.71,15.25 23.71,10.17 23.39,9.85 20.59,9.85 20.34,9.6 v20.34,7.31
D+  (via drill 0.15)
  Top 0.127: v25.68,11.31 25.68,11.25 25.48,11.06 U1.P$AD6 | v27.2,32.97 27.83,33.6 28.09,33.6 D3.4 | v36.03,14.74 36.03,12.14 v34.82,10.94
  Bottom 0.127: v25.68,11.31 25.68,11.23 25.97,10.94 v34.82,10.94 | v36.03,14.74 36.03,26.04 29.1,32.97 v27.2,32.97
D-  (via drill 0.15)
  Top 0.127: v25.04,10.42 24.98,10.49 24.98,10.99 U1.P$AD4 | v22.56,9.22 22.12,9.66 22.12,10.42 v22.75,11.06 | v27.52,31.12 28.09,31.7 D3.6
  Bottom 0.127: v25.04,10.42 24.72,10.42 23.52,9.22 v22.56,9.22 | v22.75,11.06 22.75,16.77 23.83,17.85 26.82,17.85 27.52,18.55 v27.52,31.12
DN
  Top 0.127: J4.A7 21.42,28.2 21.42,27.7 21.67,27.44 22.12,27.44 22.37,27.7 22.37,28.2 J4.B7 22.44,28.27 22.44,28.84 23.96,30.36 28.34,30.36 29.68,31.7 30.56,31.7 D3.1
DP
  Top 0.127: 21.83,28.87 21.87,28.84 21.87,28.27 J4.A6 | 21.83,28.87 21.67,29.03 21.17,29.03 20.91,28.77 20.91,28.27 J4.B6 | 21.83,28.87 23.58,30.62 28.21,30.62 28.91,31.31 28.91,32.14 30.37,33.6 30.56,33.6 D3.3
EPD_3V3  (via drill 0.15)
  Top 0.127: 4.05,29.89 2.43,28.27 L5.2 | 4.05,29.89 4.09,29.92 4.09,31.63 C1-EP-DR.1 | v12.09,18.68 13.23,19.82 EPD_C5.2 | v12.06,17.27 11.05,16.26 10.5,16.26 J1.15 10.44,16.2 10.44,15.76 J1.16 | v8.21,26.36 8.21,27.89 Q1.3 | v4.72,29.85 4.09,29.85 4.05,29.89
  Bottom 0.127: v12.06,17.27 12.09,17.3 v12.09,18.68 11.98,18.79 11.98,19.41 8.21,23.17 v8.21,26.36 v4.72,29.85
EPD_BUSY  (via drill 0.15)
  Top 0.127: v19.45,10.74 v20.72,9.47 | v11.13,19.27 11.05,19.19 10.5,19.19 J1.9 | U1.P$AD12 26.88,10.99 26.88,10.74 26.76,10.61 v26.76,10.34
  Bottom 0.127: v20.72,9.47 20.85,9.6 23.52,9.6 24.72,10.8 25.17,10.8 25.55,10.42 26.67,10.42 v26.76,10.34 | v19.45,10.74 13.36,10.74 10.88,13.22 10.88,19.01 v11.13,19.27
EPD_CS  (1 unrouted)
EPD_DC
  Top 0.127: U1.P$AD10 26.44,10.99 26.44,10.8 26.18,10.55 26.18,10.23 25.48,9.53 23.39,9.53 21.93,8.07 17.61,8.07 17.36,8.33 15.13,8.33 14.31,9.15 14.31,10.42 13.99,10.74 13.99,11.95 15.13,13.09 15.13,14.53 15.69,15.09 15.69,18.76 15.78,18.85 15.78,19.61 15.67,19.72 15.01,19.72 14.9,19.61 14.9,19.25 14.75,19.1 14.33,19.1 14.31,19.12 13.04,19.12 12.21,18.3 10.5,18.3 J1.11
EPD_RST  (1 unrouted)
GDR
  Top 0.127: Q3.1 12.85,26.68 11.64,26.68 R2_EP_DR.2 11.64,26.62 10.5,25.47 10.5,23.25 J1.1
GND  (via drill 0.15)
  Top 0.127: 18.69,5.72 18.44,5.72 18.02,6.14 | 18.69,5.72 19.96,5.72 23.26,9.03 24.41,9.03 C21.2 | 18.02,6.14 17.93,6.23 17.93,6.55 | 17.93,6.55 17.93,6.8 U3.9 | U3.4 16.91,6.1 17.99,6.1 18.02,6.14 | 17.93,6.55 18.82,6.55 U3.6 | 17.93,6.55 U3.9 | 18.69,5.72 18.69,2.8 TP_BAT_GND1.TP | 14.34,5.75 13.99,6.1 13.67,6.1 C29.2 | 14.34,5.75 14.94,5.15 C27.2 13.67,3.82 13.55,3.82 SW_DN.1 | 21.1,9.92 21.42,9.92 21.55,10.04 C20.2 21.61,10.11 21.61,10.3 21.99,10.68 21.99,11.63 C6.2 | 21.1,9.92 20.91,9.92 20.41,10.42 20.41,11.12 R3.1 | IC3.9 18.05,9.6 17.61,9.6 IC3.8 17.55,9.53 v17.55,9.09 | v15.71,8.71 15.52,8.9 15.26,8.9 C19.2 | 16.28,7.69 16.79,7.69 16.85,7.63 U3.1 16.91,7.56 17.23,7.56 17.48,7.31 17.48,7.25 17.86,6.87 U3.9 | 21.1,9.92 21.1,9.34 20.85,9.09 v18.75,9.09 | 16.28,7.69 14.34,5.75 | 16.28,7.69 v16.21,7.69 | IC1.D2 1.93,8.52 1.93,7.5 1.29,6.87 R9.1 1.29,6.8 1.29,6.17 2.37,5.09 C39.2 2.43,5.03 2.43,3.88 3.51,2.8 C37.2 3.58,2.8 5.36,2.8 5.93,3.37 C25.2 5.99,3.44 5.99,4.07 | IC9.C1 5.55,8.01 5.55,8.33 IC9.B1 5.48,8.33 5.36,8.45 3.96,8.45 C24.1 | IC9.C1 5.61,8.01 5.93,8.01 IC9.C2 5.99,7.95 6.31,7.95 IC9.C3 6.37,7.95 6.5,8.07 9.8,8.07 11.23,9.5 | 5.99,4.07 5.99,4.58 6.18,4.77 C33.2 6.18,4.84 6.18,5.15 5.42,5.91 5.16,5.91 5.13,5.88 | 5.99,4.07 7.58,4.07 C23.1 | 5.13,5.88 4.34,5.09 4.02,5.09 C38.2 | 5.13,5.88 4.97,6.04 4.97,7.44 5.48,7.95 IC9.C1 | 11.23,9.5 11.26,9.53 11.26,10.3 EPD_C12.1 11.32,10.36 11.96,10.36 EPD_C11.1 13.17,11.56 13.17,12.52 EPD_C10.1 13.23,12.58 13.55,12.58 v14.05,13.09 | v11.26,9.47 11.23,9.5 | C1-EP-DR.2 4.15,32.71 5.61,34.17 16.15,34.17 17.29,33.03 J4.SH2 17.29,32.97 17.29,29.92 16.75,29.38
  Top 0.127: R_TYPE_SEL.1 18.12,23.69 17.04,24.77 17.04,25.66 SJ1.1 17.04,25.73 17.04,27.5 17.83,28.3 | EPD_C7.1 14.28,14.91 14.36,14.98 14.58,14.98 15.07,15.47 EPD_C9.1 15.25,15.77 14.81,16.21 v14.41,16.21 | 17.83,28.3 17.36,28.77 J4.SH4 17.29,28.84 16.75,29.38 | 17.83,28.3 17.86,28.27 18.44,28.27 J4.A12_B1 18.5,28.2 18.5,27.82 19.83,26.49 22.56,26.49 R2-USB1.2 22.63,26.49 22.82,26.49 | 16.75,29.38 16.72,29.41 15.52,29.41 D4.1 | 13.8,20.33 13.8,21.34 13.99,21.53 EPD_C1.1 13.99,21.6 13.67,21.92 13.67,22.93 EPD_C2.1 | 13.8,20.33 13.8,19.88 EPD_C5.1 15,20.05 15.07,19.98 15.77,19.98 16.03,19.72 16.03,19.54 | EPD_C8.1 15.64,13.47 17.17,13.47 C18.1 17.23,13.53 17.23,17.28 C17.1 | C17.1 17.23,17.34 16.03,18.54 16.03,19.54 | C17.1 17.23,17.41 17.23,17.47 17.55,17.79 17.93,17.79 18.12,17.6 21.87,17.6 C14.2 21.93,17.6 21.99,17.66 21.99,19 C5.2 22.05,22.74 22.25,22.93 22.25,25.22 22.21,25.25 | 8.56,24.11 8.53,24.08 7.83,24.08 J1.MP1 | 8.56,24.11 10.94,26.49 10.94,26.62 11.39,27.06 11.45,27.06 11.58,27.19 R2_EP_DR.1 | 10.09,15.28 9.86,15.5 9.86,19.44 10.09,19.66 | 10.09,15.28 10.12,15.25 10.44,15.25 J1.17 | 10.09,19.66 10.12,19.69 10.44,19.69 J1.8 10.5,19.76 10.75,19.76 11.32,20.33 13.8,20.33 | 10.09,15.28 7.83,13.03 7.83,10.99 J1.MP2 | 10.09,19.66 8.59,21.15 8.59,24.08 8.56,24.11 | 23.39,6.23 23.64,6.23 25.26,7.85 25.74,7.37 25.74,7.06 24.41,5.72 24.41,3.88 SW_ENT.1 | 23.39,6.23 C31.2 | 23.39,6.23 24.88,7.61 C8.2 26.66,7.65 26.86,7.25 C7.2 29.73,7.25 32.41,6.55 C30.2 32.41,6.61 32.41,8.01 | 32.41,8.01 32.41,9.03 34.76,11.38 34.76,12.58 TP_GND.TP | 42.09,10.39 42.06,10.42 42.06,11.76 42.31,12.01 42.31,12.96 41.74,13.53 J2.3 41.74,13.6 41.74,14.8 J2.5 41.68,14.87 41.68,15.38 40.85,16.2 40.85,16.52 37.39,19.98
  Top 0.127: 42.09,10.39 44.73,7.75 44.73,4.71 43.84,3.82 35.45,3.82 SW_UP.1 | C10.2 26.18,18.74 27.71,18.74 28.41,19.44 C13.2 28.6,19.44 28.72,19.44 28.76,19.41 | 28.76,19.41 29.3,18.87 29.42,18.87 C12.2 | 29.33,20.36 28.79,19.82 28.79,19.44 28.76,19.41 | 29.33,20.36 30.12,21.15 30.25,21.15 C2.2 | 32.41,16.77 32.41,17.47 C1.2 32.6,17.66 32.6,18.74 33.11,19.25 X1.2 32.98,19.19 31.77,20.39 X1.4 31.71,20.45 31.07,19.82 29.87,19.82 29.33,20.36 | 32.41,16.77 32.41,16.39 C11.2 | 25.42,16.07 25.68,16.33 25.68,16.96 U1.P$B7 | 29.61,15.82 29.23,15.82 29.04,16.01 U1.P$74 | 29.61,15.82 29.93,15.82 U1.P$F23 | U1.P$87 25.42,12.52 25.42,13.6 U1.P$74 | U1.P$83 25.42,13.66 U1.P$74 | U1.P$79 25.42,14.87 25.99,15.44 U1.P$74 | 25.42,16.07 U1.P$75 | 25.42,16.07 U1.P$74 | U1.P$74 26.63,13.6 26.63,12.52 U1.P$88 26.69,12.52 27.77,12.52 U1.P$89 | U1.P$84 26.63,13.66 U1.P$74 | U1.P$85 27.77,13.66 27.2,14.23 U1.P$74 | U1.P$90 28.98,12.52 28.98,13.6 U1.P$74 | U1.P$86 28.98,13.66 U1.P$74 | U1.P$80 26.63,14.87 U1.P$74 | U1.P$81 27.77,14.87 U1.P$74 | U1.P$76 26.56,16.01 26.06,15.5 U1.P$74 | 28.41,15.44 27.83,16.01 U1.P$77 | 28.41,15.44 28.98,14.87 U1.P$82 | 28.41,15.44 U1.P$74 | U1.P$78 29.04,16.07 U1.P$74 | 32.41,16.77 30.63,16.77 30.44,16.58 29.8,16.58 29.61,16.39 29.61,15.82 | 29.61,15.82 U1.P$74 | 37.39,19.98 38.82,21.41 38.82,22.23 | 37.39,19.98 31.68,14.26 | 31.68,14.26 31.64,14.23 31.64,13.98 C9.2 | 38.82,22.36 38.82,22.49 C4.2 | 38.82,22.36 38.82,22.23 | 38.82,22.23 39.71,22.23 C22.2 | 38.82,22.36 37.99,22.36 C3.2 37.61,22.36 37.23,21.98 34.82,21.98 33.93,22.87 33.93,24.08 33.9,24.11 | 22.82,26.49 R1_USB.1 23.2,26.49 23.45,26.49 24.85,27.89 24.85,28.2 J4.A1_B12 24.91,28.27 25.42,28.27 25.93,28.77 J4.SH3 25.99,28.77 26.95,27.82 28.15,27.82 C43.2 28.21,27.82 31.45,27.82
  Top 0.127: 22.21,25.25 22.82,25.85 22.82,26.49 | 22.21,25.25 22.18,25.22 22.05,25.22 C42.2 | 36.06,29.41 36.09,29.41 37.01,29.41 C34.2 | IC2.B3 32.98,25.22 32.46,25.73 32.46,26.28 35.59,29.41 36.06,29.41 | C15.2 26.25,21.09 27.71,21.09 C16.2 29.21,22.99 31.51,25.29 31.52,25.28 | 33.9,24.11 33.87,24.08 32.72,24.08 31.52,25.28 | 33.9,24.11 34.31,24.52 34.31,24.84 33.99,25.15 IC2.B1 | 31.52,25.28 31.52,27.32 C32.2 31.45,27.61 31.45,27.82 | 31.45,27.82 31.45,32.08 30.88,32.65 30.63,32.65 D3.2 31.01,32.58 32.66,34.23 35.9,34.23 36.61,33.52 36.61,32.51 36.06,31.96 36.06,29.41 | v31.2,14.49 31.45,14.49 31.68,14.26 | 32.41,8.01 38.06,8.01 40.22,10.17 41.87,10.17 42.09,10.39 | 16.03,19.54 EPD_C6.1
  Bottom 0.127: v18.75,9.09 v17.55,9.09 16.21,7.75 v16.21,7.69 15.71,8.2 v15.71,8.71 12.02,8.71 v11.26,9.47 | 14.37,17.85 14.37,25.85 17.29,28.77 J4.SH4 | 14.37,17.85 14.37,16.25 v14.41,16.21 | v14.05,13.09 14.05,17.53 14.37,17.85 | J4.SH1 25.99,32.97 25.99,28.84 J4.SH3 | v31.2,14.49 29.93,14.49 29.61,14.8 29.04,14.8 U1.P$82
IMU_INT1
  Top 0.127: U1.P$N1 23.87,14.08 21.71,14.08 20.02,12.39 17.74,12.39 16.72,11.38 16.72,10.87 17.04,10.55 IC3.5
IMU_INT2  (via drill 0.15)
  Top 0.127: IC3.6 16.9,10.26 16.8,10.26 16.47,10.59 16.47,11.48 17.63,12.64 19.29,12.64 v19.55,12.91 | v20.65,12.51 22.35,12.51 23.6,13.76 U1.P$P2
  Bottom 0.127: v19.55,12.91 19.95,12.51 v20.65,12.51
LX1
  Top 0.127: IC9.B2 5.99,8.39 6.31,8.39 IC9.B3 6.37,8.39 8.15,8.39 9.04,9.28 L7.1
LX2
  Top 0.127: IC9.D2 5.99,7.56 6.31,7.56 IC9.D3 6.37,7.5 8.85,7.5 9.04,7.31 L7.2
MOSI  (1 unrouted)
N$1
  Top 0.127: IC9.D1 5.48,7.5 5.42,7.5 5.23,7.31 5.23,6.68 7.07,4.84 7.07,4.77 7.26,4.58 8.21,4.58 8.28,4.52 10.25,4.52 10.56,4.84 10.75,4.84 R4.2
N$2
  pour Top: 2.83,34.84 2.81,34.82 -0.62,31.38 -0.62,0.79 0.23,-0.06 47.22,-0.06 47.27,-0.01 47.27,20.73 40.23,20.73 40.21,20.75 40.19,20.77 40.17,20.79 40.17,24.73 40.19,24.75 40.26,24.82 40.28,24.84 46.87,24.84 46.87,31.13 42.17,35.83 3.48,35.83 2.83,35.18
N$4
  Top 0.127: U1.P$C1 23.96,16.52 24.28,16.84 24.28,17.28 22.56,19 C5.1
N$5
  Top 0.127: U1.P$N24 30.5,13.98 31.07,13.98 C9.1
N$6
  Top 0.127: U1.P$AC5 25.17,11.5 24.6,11.5 24.41,11.31 23.83,11.31 22.63,10.11 C20.1
N$7
  Top 0.127: U1.P$D23 29.99,16.26 30.25,16.26 30.31,16.33 31.84,16.33 C11.1
N$8  (1 unrouted)
N$9
  Top 0.127: IC1.D1 1.48,8.52 1.48,7.69 1.29,7.5 R9.2
N$10
  Top 0.127: R1_USB.2 23.14,27.06 23.14,27.5 22.95,27.7 22.95,28.2 J4.A5
N$11
  Top 0.127: IC3.1 18.63,11.12 19.77,11.12 R3.2
N$13
  Top 0.127: U1.P$B3 24.66,17.03 24.66,17.47 23.26,18.87 23.26,20.14 L2.1
N$14
  Top 0.127: 25.23,17.28 25.23,17.03 U1.P$B5 | 25.23,17.28 26.12,18.17 C10.1 26.06,18.17 25.68,18.55 25.68,19.63 C15.1 26.25,20.2 27.33,20.2 27.71,20.58 C16.1 27.77,20.65 27.9,20.65 28.79,21.53 33.23,21.53 33.87,20.9 33.87,17.22 32.53,15.88 31.64,15.88 31.58,15.95 30.5,15.95 U1.P$E24 | 25.23,17.28 24.34,18.17 24.34,18.93 24.79,19.38 24.79,19.5 L3.2
N$15
  Top 0.127: U1.P$H23 29.99,15.31 32.34,15.31 36.03,19 36.03,20.71 L1.1 36.09,20.77 36.41,20.77 37.49,21.85 37.93,21.85 C3.1
N$16
  Top 0.127: ANT1.1 41.17,22.68 41.11,22.74 39.77,22.74 C22.1 39.71,22.81 39.52,23 38.88,23 C4.1 38.82,23 38.69,23 38.5,22.81 36.09,22.81 L1.2
N$17
  Top 0.127: U1.P$B24 30.5,17.03 31.45,17.03 32.02,17.6 C1.1 32.02,17.66 31.77,17.92 31.77,19.25 X1.1
N$18  (via drill 0.15)
  Top 0.127: v29.99,19.44 29.99,17.53 U1.P$A23 | v29.99,20.2 29.99,20.33 30.25,20.58 C2.1 30.31,20.65 30.44,20.65 30.82,21.03 32.28,21.03 32.85,20.45 33.11,20.45 X1.3
  Bottom 0.127: v29.99,20.2 v29.99,19.44
N$19
  Top 0.127: U1.P$D2 24.41,16.2 20.21,16.2 19.96,16.45 X2.2 19.9,16.52 19.13,17.28 17.8,17.28 C17.2
N$20
  Top 0.127: U1.P$F2 24.41,15.82 21.8,15.82 19.96,13.98 X2.1 19.9,13.92 19.52,13.53 17.74,13.53 C18.2
N$21
  Top 0.127: L2.2 23.26,21.15 24.09,21.15 25.36,19.88 25.36,19.06 L3.1
N$22
  Top 0.127: R17.1 8.53,4.84 8.98,4.84 9.04,4.77 9.74,4.77 9.8,4.84 R18.1
N$23
  Top 0.127: U1.P$A18 28.47,17.53 28.47,18.87 28.53,18.93 C13.1
N$24
  Top 0.127: R2-USB1.1 22.56,27.06 20.53,27.06 19.96,27.63 19.96,28.2 J4.B5
N$28
  Top 0.127: IC2.A2 33.42,24.65 33.11,24.33 32.85,24.33 31.85,25.33 31.85,26.82 32.26,27.23 C32.1
N$32
  Top 0.127: EPD_C2.2 12.66,22.93 11.45,22.93 10.82,22.3 10.5,22.3 J1.3
N$33
  Top 0.127: EPD_C1.2 13.04,21.6 10.63,21.6 10.5,21.73 J1.4
N$34
  Top 0.127: J1.18 10.5,14.74 12.45,14.74 15.34,17.63 EPD_C6.2
N$35
  Top 0.127: J1.19 10.5,14.3 13.06,14.3 EPD_C7.2
N$37
  Top 0.127: EPD_C8.2 14.63,13.47 11.64,13.47 11.39,13.73 10.5,13.73 J1.20
N$39
  Top 0.127: EPD_C10.2 12.15,12.58 10.63,12.58 10.5,12.71 J1.22
N$42
  Top 0.127: EPD_C12.2 10.31,10.36 10.31,11.56 10.44,11.69 J1.24
N$43
  Top 0.127: 8.24,29.5 7.01,28.27 L5.1 | 8.24,29.5 8.28,29.54 8.28,30.42 C2-EP-DR.2 8.28,30.49 6.43,32.33 6.43,33.28 D5.2 | 8.24,29.5 9.48,28.27 12.34,28.27 14.5,26.11 14.94,26.11 Q3.3
N$44
  Top 0.127: 11.04,30.39 11.96,29.47 D4.2 | 11.04,30.39 11.01,30.42 9.36,30.42 C2-EP-DR.1 | 11.04,30.39 11.32,30.68 11.32,32.97 D2.1
N$45
  Top 0.127: 18.5,24.27 18.69,24.27 R1_EP_DR.1 | 18.5,24.27 18.18,24.27 R_TYPE_SEL.2 | 18.5,24.27 18.5,25.66 SJ1.2
OUT+
  Top 0.127: TP_OP.TP 33.08,32.83 33.08,27.26 32.11,26.28 32.11,25.58 32.98,24.71 IC2.A3
OUT-  (via drill 0.15)
  Top 0.127: IC2.C3 32.75,25.9 32.75,26.21 33.35,26.81 v33.85,26.81 | v33.45,28.01 33.45,31.03 TP_ON.TP
  Bottom 0.127: v33.85,26.81 33.45,27.21 v33.45,28.01
P0.13  (via drill 0.15)
  Top 0.127: SW_DN.2 10.75,3.82 10.75,4.14 11.96,5.34 R5.1 12.02,5.34 13.42,5.34 13.61,5.15 C29.1 13.67,5.09 v14.44,5.09 | 33.01,4.93 32.47,5.47 C30.1 32.41,5.53 27.01,5.53 v25.87,6.68 | 33.01,4.93 33.04,4.9 34.5,4.9 R7.1 | 33.01,4.93 32.66,4.58 32.66,3.82 SW_UP.2 | v25.36,9.92 25.93,10.49 25.93,10.99 U1.P$AD8 | v25.36,7.18 23.39,5.22 C31.1 23.33,5.15 23.26,5.09 22.12,5.09 R8.1 22.05,5.03 21.64,4.61 | 21.64,4.61 21.61,4.58 21.61,3.88 SW_ENT.2 | 21.64,4.61 v21.17,5.09
  Bottom 0.127: v25.36,9.92 v25.36,7.18 v25.87,6.68 | v21.17,5.09 v14.44,5.09
P1.01  (via drill 0.15)
  Top 0.127: v29.99,11.82 29.99,12.2 U1.P$Y23 | v10.94,27.63 10.31,27 Q1.1 10.25,26.93 8.85,25.53 8.66,25.53 R_PWR_EPD.1
  Bottom 0.127: v10.94,27.63 13.86,30.55 16.4,30.55 19.96,34.11 28.46,34.11 36.28,26.29 36.28,18.74 41.87,13.15 41.87,10.68 40.47,9.28 38.12,9.28 35.4,12.01 31.3,12.01 31.11,11.82 v29.99,11.82
PMIC_INT  (via drill 0.15)
  Top 0.127: v7.26,10.04 1.8,10.04 1.55,9.79 IC1.A1 | v24.47,12.84 24.47,13.22 U1.P$T2
  Bottom 0.127: v7.26,10.04 17.05,10.04 20.28,10.04 20.91,10.68 22.88,10.68 23.45,11.25 23.45,15.38 25.04,16.96 29.36,16.96 31.58,14.74 31.58,14.17 29.23,11.82 25.17,11.82 24.47,12.52 v24.47,12.84
PREVGH  (via drill 0.15)
  Top 0.127: v11.26,13.34 10.56,13.34 10.5,13.28 J1.21 | v9.93,30.81 9.93,33.28 D5.1 | EPD_C9.2 14.16,15.38 13.57,15.38 v13.43,15.24
  Bottom 0.127: v11.26,13.34 13.29,15.38 | 13.29,15.38 13.23,15.38 13.23,18.04 12.23,19.04 12.23,19.52 9.93,21.82 v9.93,30.81 | 13.29,15.38 v13.43,15.24
PREVGL  (via drill 0.15)
  Top 0.127: J1.23 10.5,12.2 10.82,12.2 11.52,11.5 12.02,11.5 EPD_C11.2 12.09,11.5 v12.59,12.01 | v14.82,30.17 14.82,32.97 D2.2
  Bottom 0.127: v14.82,30.17 14.82,26.68 13.77,25.64 13.77,15.09 13.67,15 13.67,13.09 v12.59,12.01
RESE
  Top 0.127: 13.2,25.12 12.91,25.41 Q3.2 | 13.2,25.12 15.01,23.31 18.37,23.31 18.69,23.63 R1_EP_DR.2 | 13.2,25.12 10.82,22.74 10.5,22.74 J1.2
RESET  (via drill 0.15)
  Top 0.127: 40.47,14.8 40.79,14.8 v41.36,14.23 | v43.07,12.52 44.22,12.52 45.11,11.63 45.11,4.71 42.63,2.23 38.76,2.23 TP_RESET.TP | 40.47,14.8 J2.6 | v32.95,11.41 32.95,10.61 v33.15,10.41 | v34.95,10.51 36.55,12.11 v36.55,14.81 | 40.47,14.8 39.97,15.3 39.72,15.3 39.01,16.01 v38.05,16.01
  Bottom 0.127: v43.07,12.52 v41.36,14.23 | U1.P$AC13 29.65,11.51 29.95,11.21 32.75,11.21 v32.95,11.41 | v33.15,10.41 33.25,10.51 v34.95,10.51 | v36.55,14.81 37.75,16.01 v38.05,16.01
  other vias: 27.19,11.51
SCK  (via drill 0.15)
  Top 0.127: v26.69,18.23 26.88,18.04 26.88,17.53 U1.P$A12 | v21.87,23.06 14.37,23.06 13.93,23.5 v13.23,23.5 | v13.1,18.68 12.98,18.68 11.58,17.28 10.5,17.28 J1.13
  Bottom 0.127: v21.87,23.06 v26.69,18.23 | v13.23,23.5 13.23,18.81 v13.1,18.68
SCL  (via drill 0.15)  (1 unrouted)
  Top 0.127: v1.04,9.41 1.48,9.41 IC1.B1 | v7.9,6.04 8.47,5.47 R17.2 | R4.1 10.82,5.47 10.82,6.8 12.78,8.77 TP_SCL.TP v14.69,6.93 | v36.66,23.69 34.69,25.66 33.99,25.66 IC2.C1 | v19.58,6.93 19.01,6.93 18.88,7.06 U3.7 | IC3.12 18.63,10.55 18.75,10.55 v19.77,9.53
  Bottom 0.127: v7.9,6.04 4.21,9.72 2.37,9.72 1.23,8.58 0.97,8.58 0.72,8.84 0.72,9.09 v1.04,9.41 1.29,9.41 2.12,10.23 6.56,10.23 9.86,6.93 v14.69,6.93 v19.58,6.93 19.77,6.93 | v36.66,23.69 36.66,23.25 45.11,14.8 45.11,10.36 40.53,5.79 21.36,5.79 20.21,6.93 19.77,6.93 | 19.77,6.93 v19.77,9.53
SDA  (via drill 0.15)
  Top 0.127: v21.1,14.49 23.9,14.49 U1.P$L1 | v18.25,11.63 18.25,11.44 18.12,11.31 18.12,11.18 IC3.2 | TP_SDA.TP 15.26,11.25 15.45,11.25 v16.25,12.05 | v1.1,8.96 1.48,8.96 IC1.C1 | v8.91,6.04 9.23,5.72 R2.1 9.29,5.66 9.48,5.47 9.8,5.47 R18.2 9.8,5.53 10.37,6.1 10.37,8.01 12.34,9.98 13.36,9.98 13.39,9.95 | 13.39,9.95 14.05,9.28 14.05,9.03 15.01,8.07 17.23,8.07 17.48,7.82 18.31,7.82 18.5,7.63 18.82,7.63 U3.8 | v13.61,11.12 13.61,10.17 13.39,9.95
  Bottom 0.127: v21.1,14.49 21,14.59 20.7,14.59 18.25,12.13 v18.25,11.63 16.67,11.63 | v1.1,8.96 1.23,8.96 2.24,9.98 4.97,9.98 v8.91,6.04 | 16.67,11.63 14.12,11.63 v13.61,11.12 | 16.67,11.63 v16.25,12.05
SWDCLK
  Top 0.127: 37.9,12.68 37.93,12.64 39.52,12.64 40.41,13.53 J2.4 | 37.9,12.68 36.98,13.6 36.98,16.01 35.84,17.15 34.95,17.15 34.18,16.39 34.18,15.82 30.5,12.14 30.5,12.01 U1.P$AA24 | 37.9,12.68 34.56,9.34 34.56,9.22 TP_SWDCLK.TP
SWDIO  (via drill 0.15)
  Top 0.127: v38.12,6.17 39.07,5.22 TP_SWDIO.TP | U1.P$AC24 30.5,11.5 31.28,11.5 v31.33,11.55 | v37.93,8.39 38.06,8.39 40.03,10.36 40.03,11.12 40.41,11.5 40.41,12.26 J2.2
  Bottom 0.127: 37.9,8.36 38.12,8.14 v38.12,6.17 | v37.93,8.39 37.9,8.36 | v31.33,11.55 32.61,11.55 32.81,11.75 34.51,11.75 37.9,8.36
SWO
  Top 0.127: U1.P$AD22 29.49,11.06 29.74,11.31 30.18,11.31 30.44,11.06 31.45,11.06 35.33,14.93 35.33,15.88 TP_SWO.TP
VBAT  (via drill 0.15)
  Top 0.127: IC1.C2 1.99,8.9 2.05,8.9 2.75,8.2 2.75,7.37 3.39,6.74 3.39,3.95 3.51,3.82 C37.1 3.58,3.75 v4.4,3.75 | U3.2 16.91,7.06 16.91,6.61 U3.3 16.85,6.55 16.59,6.55 15.52,5.47 15.52,5.15 C27.1 15.52,5.09 15.52,3.44 15.55,3.41 | 15.55,3.41 16.4,2.55 TP_VBAT1.TP | 15.55,3.41 v15.33,3.18
  Bottom 0.127: v4.4,3.75 5.42,3.75 6.37,2.8 9.23,2.8 9.61,3.18 v15.33,3.18
VBUS  (via drill 0.15)
  Top 0.127: D3.5 28.09,32.65 27.83,32.65 27.01,31.82 22.44,31.82 19.26,28.65 19.26,28.27 J4.A9_B4 19.26,28.2 19.26,27.76 v20.15,26.87 | 2.97,9.38 3.01,9.34 3.01,7.5 3.96,6.55 3.96,6.1 C38.1 | 2.97,9.38 2.62,9.72 1.99,9.72 IC1.A2 | 24.47,10.3 24.47,10.11 C21.1 24.47,10.3 | 24.47,10.3 24.47,10.99 U1.P$AD2 | v22.44,26.04 22.37,26.04 22.05,25.73 C42.1 | v23.77,27.38 23.77,27.95 24.02,28.2 J4.A4_B9 24.02,28.27 23.9,28.39 23.9,29.6 24.41,30.11 26.31,30.11 27.58,28.84 28.15,28.84 C43.1 | v23.33,10.3 24.47,10.3 | v21.04,11.88 v21.04,10.3 | v8.15,10.42 7.39,9.66 3.39,9.66 3.13,9.41 3.01,9.41 2.97,9.38
  Bottom 0.127: v23.77,27.38 v22.44,26.04 21.71,25.31 | v21.04,10.3 v23.33,10.3 | 21.71,25.31 21.48,25.09 21.48,14.36 21.04,13.92 v21.04,11.88 21.04,11.82 19.58,10.36 19.33,10.36 19.26,10.42 v8.15,10.42 | 21.71,25.31 v20.15,26.87
VREG  (via drill 0.15)
  Top 0.127: IC9.A3 6.31,8.77 5.99,8.77 IC9.A2 5.93,8.77 5.55,8.77 IC9.A1 5.48,8.77 4.34,8.77 4.15,8.96 3.96,8.96 C24.2 3.89,9.03 3.77,9.15 v3.39,9.15 | v2.5,9.34 1.99,9.34 IC1.B2 | v5.99,6.74 7.58,5.15 C23.2 | v3.01,6.61 2.43,6.04 C39.1 | v6.5,3.18 7.51,2.17 TP_VREG.TP
  Bottom 0.127: v2.5,9.34 3.2,9.34 v3.39,9.15 4.47,8.07 | v5.99,6.74 5.8,6.74 5.77,6.77 | 4.47,8.07 5.77,6.77 | 4.47,8.07 v3.01,6.61 | v6.5,3.18 6.5,3.82 4.91,5.41 4.91,5.91 5.77,6.77
(copper drawn outside any net)
  shapes: Top area x2